# Altium PCB ControlBoard.PcbDoc
Units mil, origin at the board's own origin, x right, y up, seen from the top; angles counter-clockwise.
Board outline 1195.03 x 1520.03 mil, 4 copper layers (Top Layer, POWER, GND, Bottom Layer), stack 23.756 mil thick; 32 components, 19 nets, 79 pads, 31 vias.
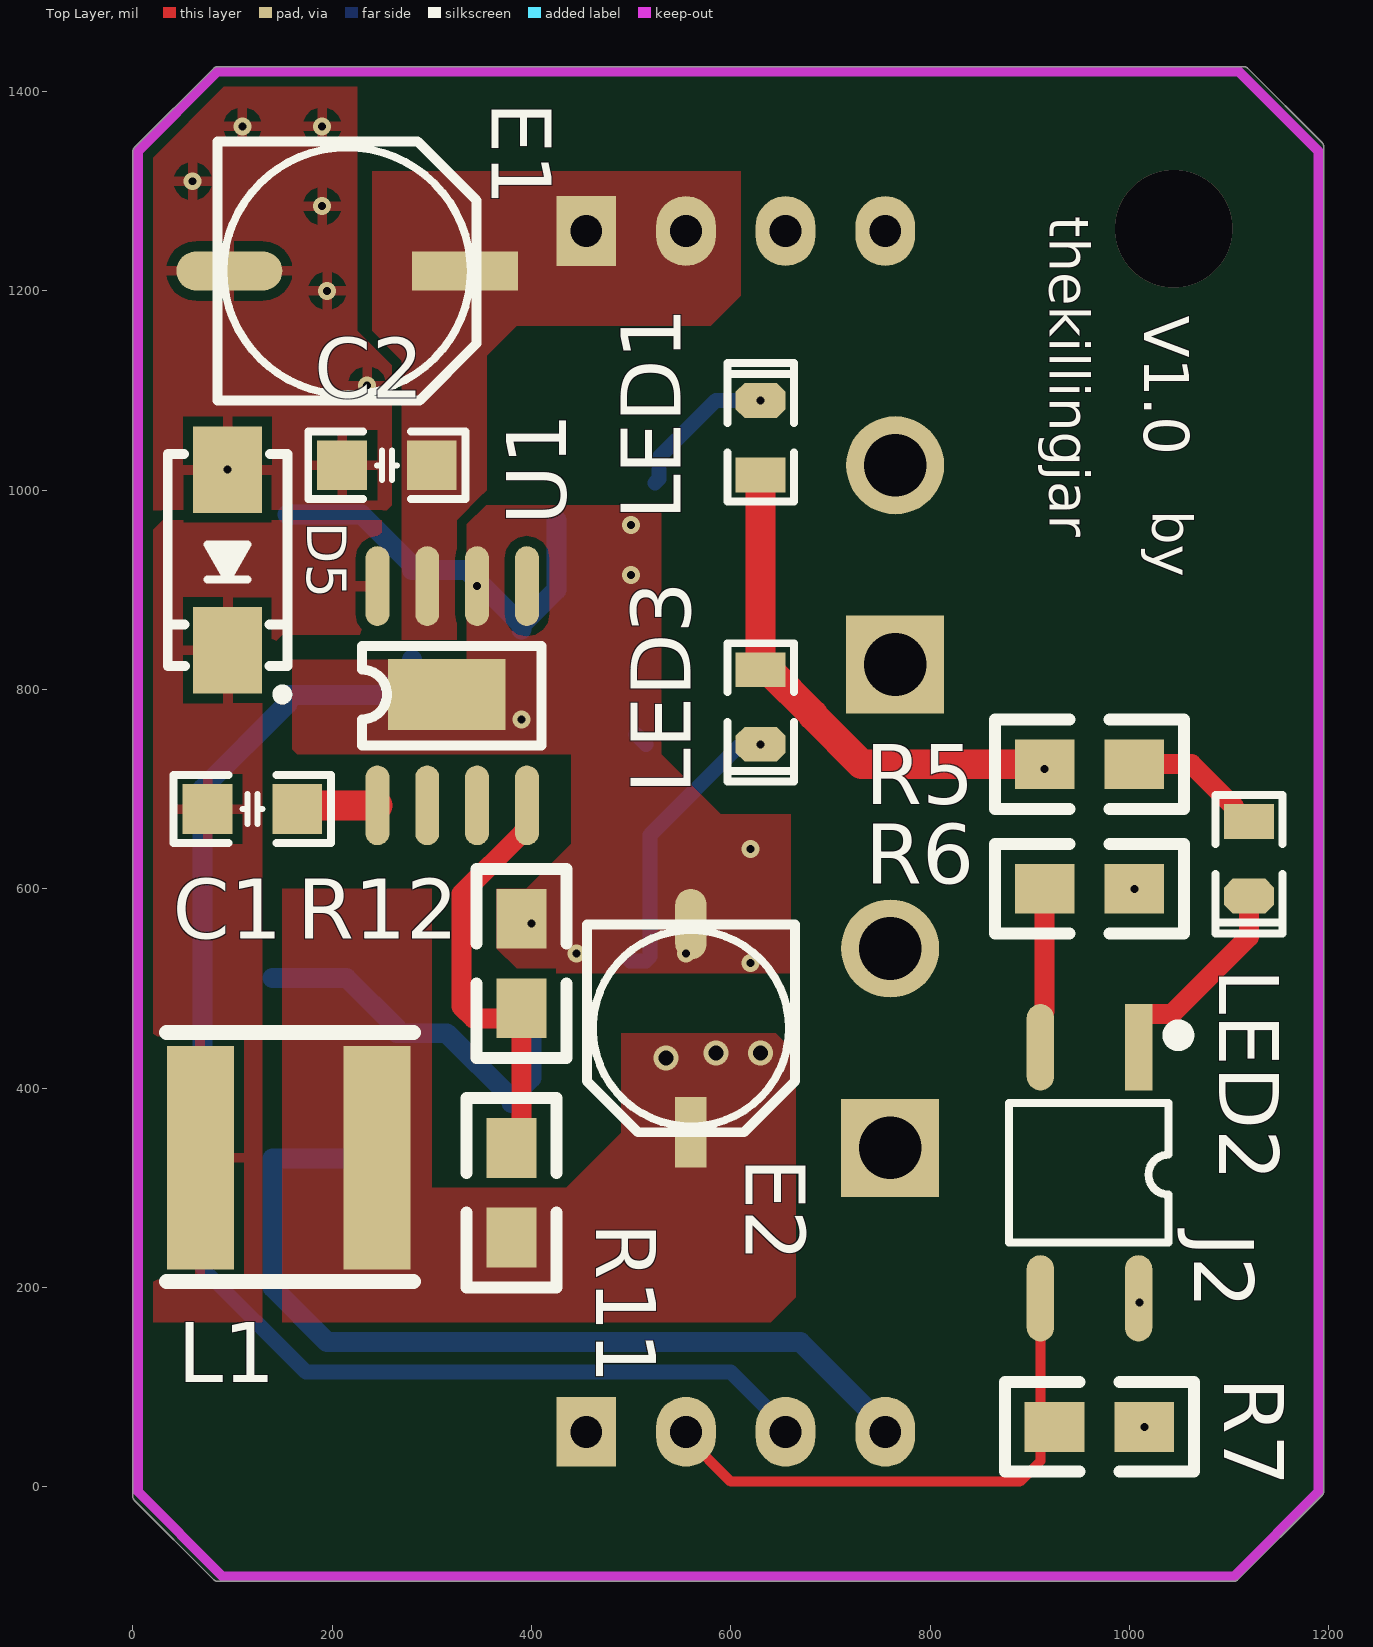
[diagram p0: Top Layer view]
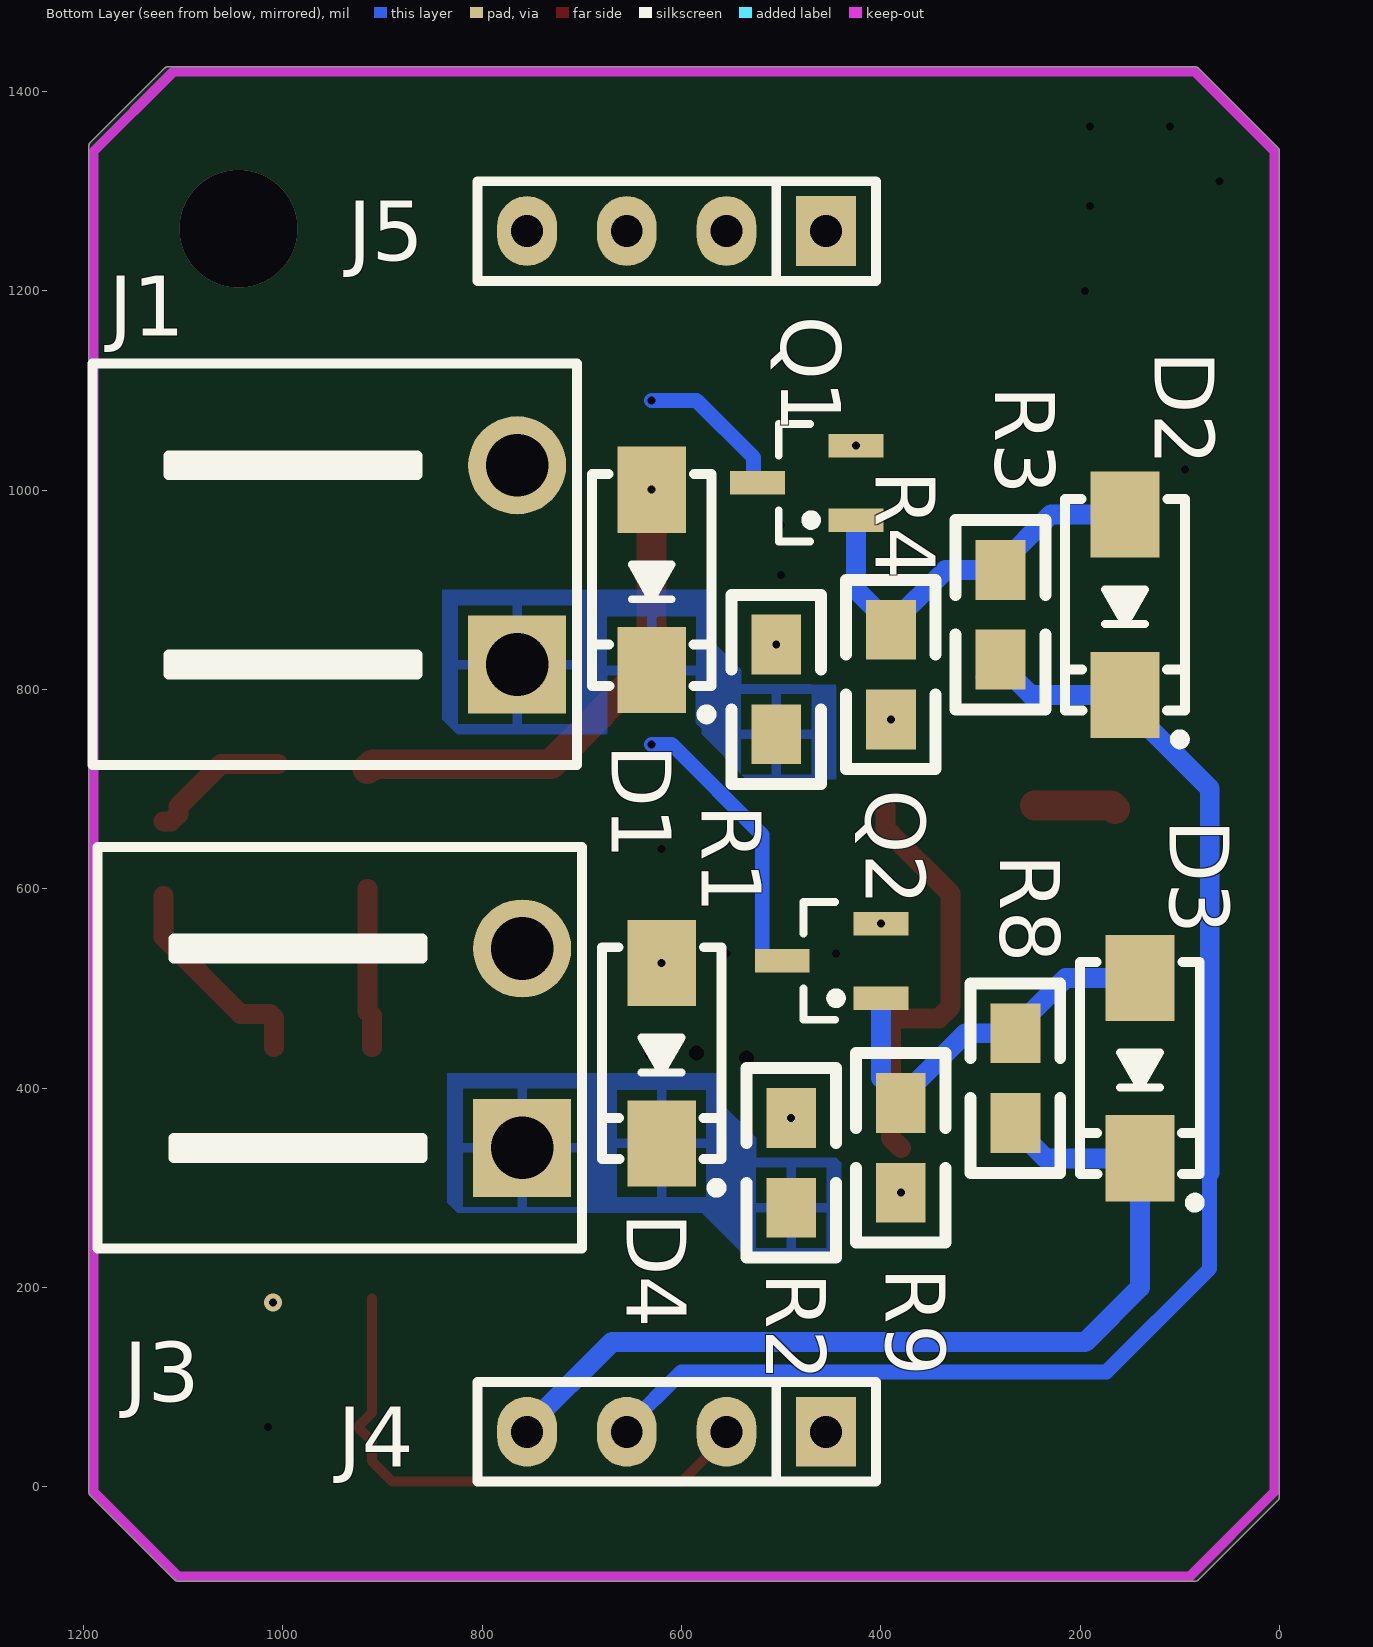
[diagram p1: Bottom Layer view, seen from below]
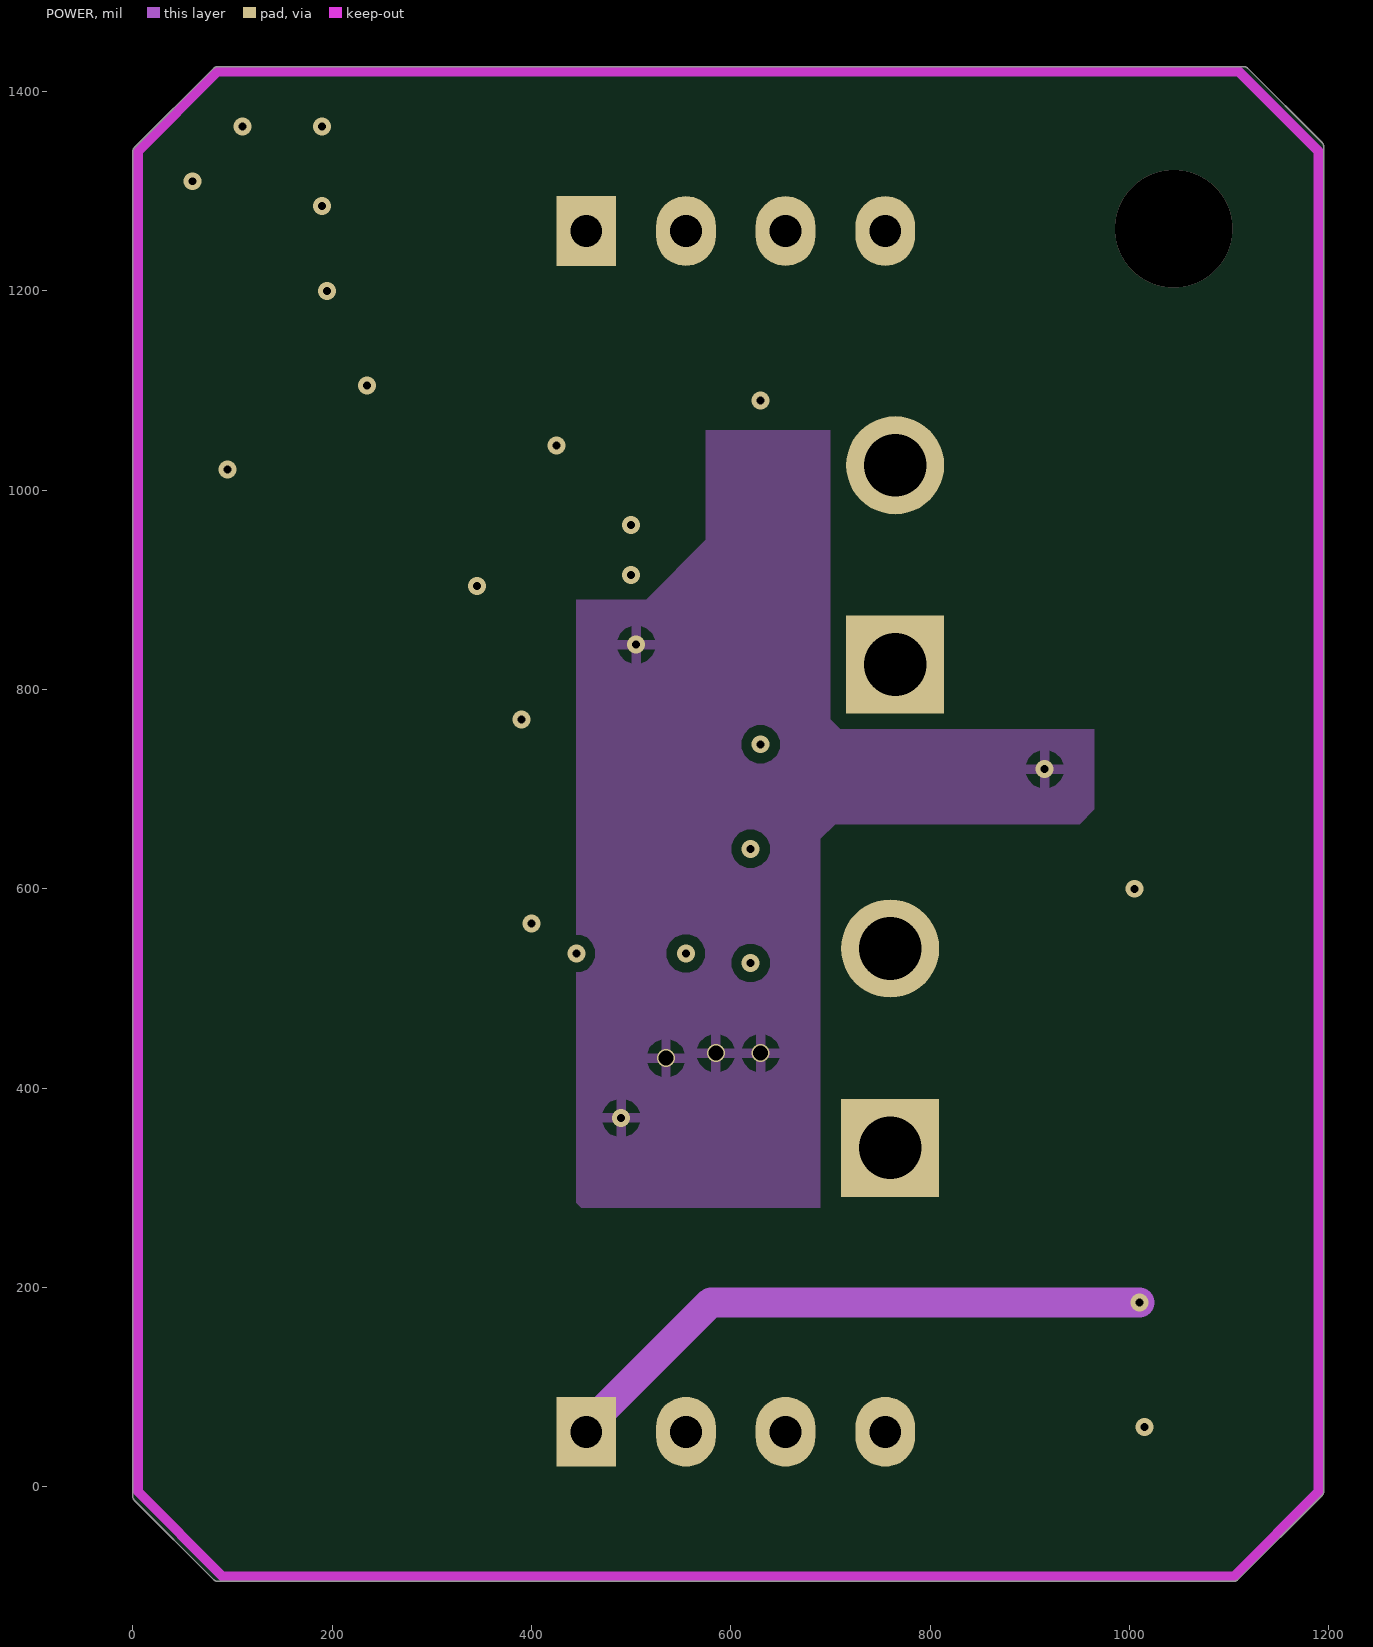
[diagram p2: POWER]
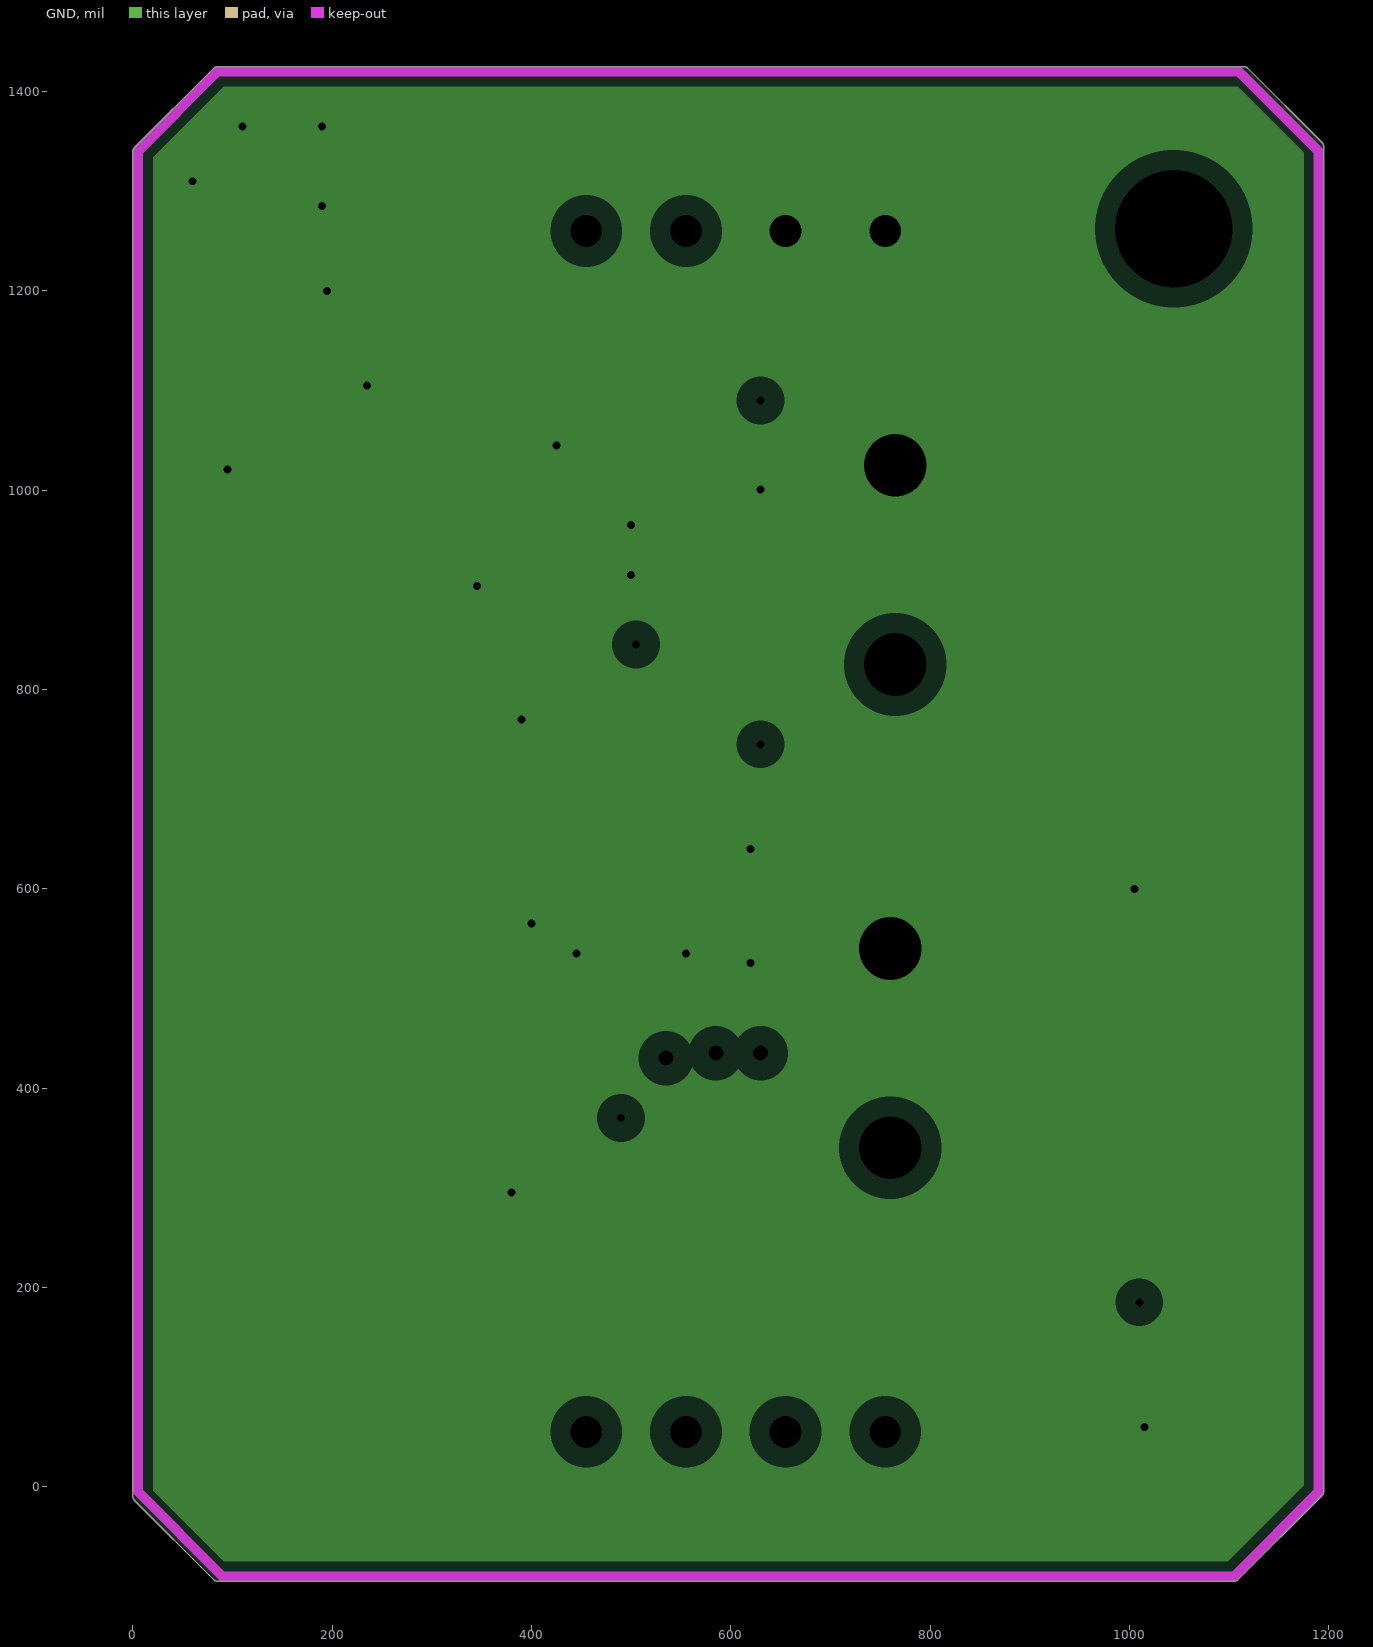
[diagram p3: GND, clearances drawn from the general rule]

## Layer stack, top to bottom
Top Solder: solder mask 0.4, Solder Resist, Dk 3.5
Top Layer: signal copper 1.4
Dielectric 2: prepreg 2.8, PP-006, Dk 4.1
POWER: signal copper 1.378
Dielectric 1: dielectric 12.6, FR-4, Dk 4.8
GND: plane copper 1.378, net GND
Dielectric 3: prepreg 2.8, PP-006, Dk 4.1
Bottom Layer: signal copper 1.4
Bottom Solder: solder mask 0.4, Solder Resist, Dk 3.5

## Board outline
1.47,-13.56 cw(c5,-10) -0.01,-10 -0.01,1340 cw(c5,1340) 1.47,1343.56 1.45,1343.55 81.45,1423.55 81.44,1423.53 cw(c85,1420) 85,1425.01 1115,1425.01 cw(c1115,1420) 1118.56,1423.53 1118.55,1423.55 1193.55,1348.55 1193.53,1348.56 cw(c1190,1345) 1195.01,1345 1195.01,-5 cw(c1190,-5) 1193.53,-8.56 1193.55,-8.55 1108.55,-93.55 1108.56,-93.53 cw(c1105,-90) 1105,-95.01 85,-95.01 cw(c85,-90) 81.44,-93.53 81.45,-93.55

## Design rules (kind name [scope] priority, off if disabled: settings)
Clearance [All] p1: gap=10 ignorepadtopadclearanceinfootprint=FALSE except(0: Arc-Hole Track-Hole SMDPad-Hole THPad-Hole Via-Hole Fill-Hole Poly-Hole Region-Hole Text-Hole)
HoleSize [All] p1: absolutevalues=TRUE maxlimit=120 minlimit=1 maxpercent=80.000 minpercent=20.000
PlaneClearance [All] p1: clearance=20
PlaneConnect [All] p1: planeconnectstyle=Relief reliefexpansion=20 reliefentries=4 reliefconductorwidth=10 reliefairgap=10
PolygonConnect GND_L01_P003 [All vs IsNamedPolygon('GND_L01_P003')] p1: connectstyle=Direct reliefconductorwidth=10 reliefentries=4 polygonreliefangle="90 Angle" airgapwidth=10
PolygonConnect VCC_24V_L01_P002 [All vs IsNamedPolygon('VCC_24V_L01_P002')] p2: connectstyle=Direct reliefconductorwidth=10 reliefentries=4 polygonreliefangle="90 Angle" airgapwidth=10
PolygonConnect 11 [All vs IsNamedPolygon('VCC_24V_L01_P002')] p3: connectstyle=Direct reliefconductorwidth=10 reliefentries=4 polygonreliefangle="90 Angle" airgapwidth=10
PolygonConnect PolygonConnect_4 [All vs IsNamedPolygon('VCC_24V_L01_P002')] p4: connectstyle=Direct reliefconductorwidth=10 reliefentries=4 polygonreliefangle="90 Angle" airgapwidth=10
PolygonConnect PolygonConnect_3 [All vs IsNamedPolygon('ACTUATOR_IN_L01_P000')] p5: connectstyle=Direct reliefconductorwidth=10 reliefentries=4 polygonreliefangle="90 Angle" airgapwidth=10
PolygonConnect 123 [All vs IsNamedPolygon('ACTUATOR_IN_L01_P000')] p6: connectstyle=Direct reliefconductorwidth=10 reliefentries=4 polygonreliefangle="90 Angle" airgapwidth=10
PolygonConnect PolygonConnect_2 [All vs IsNamedPolygon('ACTUATOR_IN_L01_P000')] p7: connectstyle=Direct reliefconductorwidth=10 reliefentries=4 polygonreliefangle="90 Angle" airgapwidth=10
PolygonConnect PolygonConnect_1 [All vs IsNamedPolygon('ACTUATOR_IN_L01_P000')] p8: connectstyle=Direct reliefconductorwidth=10 reliefentries=4 polygonreliefangle="90 Angle" airgapwidth=10
PolygonConnect [All] p9: connectstyle=Relief reliefconductorwidth=10 reliefentries=4 polygonreliefangle="90 Angle" airgapwidth=10
RoutingVias RoutingVias_1 [InNet('No Net')] p1: holewidth=28 width=50 viastyle="Through Hole" minholewidth=28 minwidth=50 maxholewidth=200 maxwidth=200
RoutingVias [All] p2: holewidth=8 width=18 viastyle="Through Hole" minholewidth=8 minwidth=18 maxholewidth=20 maxwidth=35
SilkToSilkClearance [All] p1 off: silktosilkclearance=10
SilkToSolderMaskClearance [IsPad] p1 off: minsilkscreentomaskgap=10 clearancetoexposedcopper=TRUE
SolderMaskExpansion [All] p1: expansion=4 istentingtop=FALSE
Width [All] p1: maxlimit=30 minlimit=10 preferedwidth=10 minimp=50.000000 maximp=50.000000 favimp=50.000000
25 further rules are at their usual default settings.

## Classes and differential pairs
polygon class PolygonClass_1: VCC_24V_L01_P002

## Components (designator, comment, footprint, x,y, rotation, side; value= is the part's Value field where it differs from the comment)
C1 "0.01uF" "C 0805_M" 119.99,679.99 r180 top
C2 "10nF" "C 0805_M" 255,1025 r180 top
D1 "SS14" SMA 630,910 r270 bottom
D2 "SS14" SMA 155,885 r270 bottom
D3 "SS14" SMA 140,420 r270 bottom
D4 "SS14" SMA 620,435 r270 bottom
D5 "B340A" SMA 95,930 r270 top
E1 "100uF/35V" "CM D(6.3*7.7)" 215,1220 r0 top
E2 "10uF/25V" "CM C(5*5.4)" 560,460 r270 top
J1 "KF2EDGK-2P" KF2EDGK5.08W-2P 765,825 r90 bottom
J2 "TLP181" SOP4 960,315 r270 top
J3 "KF2EDGK-2P" KF2EDGK5.08W-2P 760,340 r90 bottom
J4 "Pin HDR1X4" "PIN HDR1X4/2.54MM-S" 455,55 r270 bottom
J5 "Pin HDR1X4" "PIN HDR1X4/2.54MM-S" 455,1260 r270 bottom
L1 "68uH" SMD,6.0*6.0 156.42,330 r0 top
LED1 "蓝色" "LED 0805B" 629.99,1052.6 r90 top
LED2 "白色" "LED 0805W" 1120,630 r270 top
LED3 "蓝色" "LED 0805B" 630.01,782.4 r270 top
Q1 "AO3400" SOT23 425,970 r90 bottom
Q2 "AO3400" SOT23 400,490.2 r90 bottom
R1 "0R" 0805R 505,755 r90 bottom
R2 "0R" 0805R 490,280 r90 bottom
R3 "30R" 0805R 280,920 r270 bottom
R4 "10K" 0805R 390,860 r270 bottom
R5 "2K2" 0805R 1005,725 r180 top
R6 "100R" 0805R 915,600 r0 top
R7 "1K" 0805R 925,60 r0 top
R8 "30R" 0805R 265,455 r270 bottom
R9 "10K" 0805R 380,385 r270 bottom
R11 "10K" 0805R 380,340 r270 top
R12 "536R" 0805R 390,570 r270 top
U1 "TPS5430" SOP8-PAD 245,685 r90 top

## Footprints (in the part's own frame and the unit in brackets; to place one, negate y for a bottom-side part, rotate by r counter-clockwise, add the part's x,y. Pads: shape width x height; smd on the part's side, far side on the other; paste and mask are expansions set on the pad)
0805R [mil]
  rect 60x50 smd: 1(0,0) 2(90,0)
  silkscreen extent -50,-45 140,45, body extent 1,-25 80,25, height 15
"C 0805_M" [mil] "无极性贴片电容"
  rect 50x50 smd: 1(-45.01,-0.01) 2(45,0)
  silkscreen extent -79,-34 79,34, body extent -39,-24 39,24, height 20
"CM C(5*5.4)" [mm] "贴片电解电容，直径5mm，高5.4mm"
  rect 1.8x0.8 smd: 1(2.65,0)
  oval 1.8x0.8 smd: 2(-2.65,0)
  silkscreen extent -2.65,-2.65 2.65,2.65, body extent -2.95,-2.65 2.95,2.65, height 5.4
"CM D(6.3*7.7)" [mm] "贴片电解电容，直径6.3mm，高7.7mm"
  rect 2.7x1 smd: 1(3,0)
  oval 2.7x1 smd: 2(-3,0)
  silkscreen extent -3.3,-3.3 3.3,3.3, body extent -3.5,-3.3 3.5,3.3, height 7.7
KF2EDGK5.08W-2P [mm]
  rect 2.5x2.5 hole 1.6: 1(0,0)
  round 2.5 hole 1.6: 2(5.08,0)
  silkscreen extent -2.57,-1.52 7.67,10.82, body extent -2.54,-0.57 7.62,10.73, height 8.5
"LED 0805B" [mil] "蓝色0805LED"
  rect 35x50 smd: 1(-37.4,-0.01)
  oct 35x50 smd: 2(37.4,-0.01)
  silkscreen extent -64,-33 75,33, body extent -39,-25 39,25, height 32
"LED 0805W" [mil] "白色0805LED"
  rect 35x50 smd: 1(-37.4,0)
  oct 35x50 smd: 2(37.4,0)
  silkscreen extent -64,-33 75,33, body extent -39,-25 39,25, height 32
"PIN HDR1X4/2.54MM-S" [mil]
  rect 70x60 hole 32: 1(0,0)
  oval 70x60 hole 32: 2(0,-100) 3(0,-200) 4(0,-300)
  silkscreen extent -50,-350 50,50, body extent -50,-350 50,50, height 336
SMA [mm] "4.5x2.6*2.2mm（长宽高，不包括引脚）"
  rect 2.2x1.75 smd: 1(-2.3,0) 2(2.3,0)
  silkscreen extent -2.7,-1.52 3.56,1.52, body extent -2.52,-1.3 2.57,1.3, height 2.15
SMD,6.0*6.0 [mm]
  rect 1.7x5.7 smd: 1(-2.25,0) 2(2.25,0)
  silkscreen extent -3.12,-3.15 3.18,3.2
SOP4 [mm] "4.4*6.8*2.1mm（长宽高）"
  rect 2.2x0.7 smd: 1(-3.2,1.25)
  oval 2.2x0.7 smd: 2(-3.2,-1.25) 3(3.2,-1.25) 4(3.2,1.25)
  silkscreen extent -3.66,-2.05 1.78,2.42, body extent -3.4,-2.15 3.4,2.15, height 1.9
SOP8-PAD [mil]
  oval 80x24 smd: 1(-1.24,-0.45) 2(-1.24,-50.45) 3(-1.24,-100.45) 4(-1.24,-150.45) 5(218.76,-150.45) 6(218.76,-100.45) 7(218.76,-50.45) 8(218.76,-0.45)
  rect 70.87x118.11 smd: 9(110,-70)
  silkscreen extent 59,-165 159,15, body extent -8,-177 228,20, height 75
SOT23 [mm]
  rect 0.6x1.4 smd: D(0.95,2.514) G(0,0) S(1.9,0)
  silkscreen extent -0.55,1.02 2.45,1.97, body extent -0.56,0.22 2.44,2.62, height 1.05

## Part data
C1 C2: library part C, "无极性贴片电容"
D1 D2 D3 D4: "肖特基二极管", BOM名称=肖特基二极管, 学习资源=www.ooocke.com, 属性=40V/1A, 版权归属=源创客
D5: library part SS34, "肖特基二极管 / 反向耐压大于28.5V", BOM名称=肖特基二极管, 学习资源=www.ooocke.com, 属性=40V/3A, 版权归属=源创客
E1: library part C-CM, "贴片电解电容 / ESR < 0.04R", BOM名称=贴片电解电容, 学习资源=www.ooocke.com, 版权归属=源创客
E2: library part C-CM, "贴片电解电容 / ESR < 0.088R / V>24.0002V", BOM名称=贴片电解电容, 学习资源=www.ooocke.com, 版权归属=源创客
J2: "光耦", BOM名称=光耦, 学习资源=www.ooocke.com, 版权归属=源创客
L1: library part L-CD, "贴片功率电感 / Irms>0.500003A / Ipk>0.563A", BOM名称=功率电感, 学习资源=www.ooocke.com, 版权归属=源创客
LED1 LED2 LED3: library part LED-SMD, "贴片LED", BOM名称=贴片LED, 学习资源=www.ooocke.com, 版权归属=源创客
Q1 Q2: library part N-MOS, "N沟道场效应管"
R1 R2 R3 R4 R5 R6 R7 R8 R9 R11 R12: library part RES, "贴片电阻"
U1: "DCDC降压芯片"

## Via types
v1: diameter 18/18/0 (per signal layer), hole 8, Top Layer to Bottom Layer, 17 vias
v2: diameter 18/18 (per signal layer), hole 8, Top Layer to GND, 3 vias
v3: diameter 18/0 (per signal layer), hole 8, POWER to Bottom Layer, 3 vias
v4: diameter 25/18/0 (per signal layer), hole 15, Top Layer to Bottom Layer, 3 vias
v5: diameter 0 (per signal layer), hole 8, GND to Bottom Layer, 2 vias
v6: diameter 118.11, hole 118.11, Top Layer to Bottom Layer, 1 vias
v7: diameter 18/18 (per signal layer), hole 8, Top Layer to POWER, 1 vias
v8: diameter 18/18/18 (per signal layer), hole 8, Top Layer to Bottom Layer, 1 vias

## Nets (pads, with @x,y where several pads share a name; then routed paths per layer and width w, separated by ;. In a path a pad name is that pad's centre, name@x,y a point inside that pad or via, vN(x,y) a via of type N, cw(c..) or ccw(c..) an arc to the next point about the centre after c; other vN are vias at no path point)
actuator_IN: C2.1 E1.1 J5.1 J5.2 U1.7
brake_control1_5V: D2.2 J4.3 R3.2 | length 1434
  Bottom Layer w15: 70,315 70,218.79 173.79,115 600,115 655,60 J4.3 ; R3.2 R3.2@297.5,812.5
  Bottom Layer w20: 70,315 70,700.59 155,785.59 D2.2 249.45,794.45 280,825 R3.2
brake_control2_5V: D3.2 J4.4 R8.2 | length 950.1
  Bottom Layer w20: R8.2 265,360 234.45,329.45 D3.2 140,200 195,145 670,145 755,60 J4.4
GND: C2.2 D1.1 D4.1 D5.1 E1.2 E2.2 J1.2 J3.2 J5.3 J5.4 Q1.S Q2.S R4.2 R6.2 R7.2 R9.2 R12.1 U1.6 U1.9
  other v1: 1015,60 620,525.55 445,535 555,535 400,565 620,640 390,770 500,915 500,965 95,1020.55 195,1200 190,1285 60,1310 110,1365 190,1365
  other v2: 1005,600 345.45,903.76 235,1105
  other v3: 425,1044.8
  other v5: 380,295 630,1000.55
NetC1_1: C1.1 U1.1 | length 82
  Top Layer w30: C1.1 168.76,683.76 U1.1
NetC1_2: C1.2 D5.2 L1.1 U1.8
NetD1_2: D1.2 J1.1 R1.1 | length 23
  Bottom Layer w15: R1.1 R1.1@515,745 ; D1.2@630,810.59 D1.2
NetD2_1: D2.1 Q1.G R3.1 R4.1 | length 408.2
  Bottom Layer w20: D2.1 229.45,975.55 280,925 R3.1 335,920 R4.1@390,865 ; R4.1 R4.1@390,865 ; Q1.G 425,900 R4.1@390,865
NetD3_1: D3.1 Q2.G R8.1 R9.1 | length 422.1
  Bottom Layer w20: D3.1 214.45,510.55 265,460 R8.1 315,455 R9.1@380,390 ; R9.1 R9.1@380,390 ; Q2.G@384.25,490.2 Q2.G 400,410 R9.1@380,390
NetD4_2: D4.2 J3.1 R2.1
NetJ2_1: J2.1 LED2.2 | length 214.8
  Top Layer w20: J2.1 1009.21,470.51 1012.99,474.29 1042.52,474.29 1120,551.77 LED2.2
NetJ2_2: J2.2 R6.1 | length 160.8
  Top Layer w20: J2.2 910.79,472.56 915,476.77 R6.1
NetLED1_2: LED1.2 Q1.D | length 152.9
  Bottom Layer w15: Q1.D 527.93,1011.36 527.93,1032.93 585,1090 v1(630,1090)
NetLED2_1: LED2.1 R5.1 | length 143.3
  Top Layer w20: R5.1 1062.4,725 1105,682.4 1105,674.9 1112.5,667.4 LED2.1
NetLED3_2: LED3.2 Q2.D | length 292.6
  Bottom Layer w15: Q2.D 514.72,527.6 519.03,531.91 519.03,654.03 610,745 v1(630,745)
NetR11_1: R11.1 R12.2 U1.4 | length 434.4
  Top Layer w20: R11.1 390,350 390,468.11 R12.2@390,470 ; R12.2 380,470 341.72,470 330,481.72 330,595 389.99,654.99 393.6,654.99 395.45,656.84 U1.4
shutdown_circuit_5V: J2.3 J4.2 R7.1 | length 563
  Top Layer w10: J4.2 555,50 600,5 890,5 910.86,25.86 910.86,45.86 R7.1 910.79,74.21 J2.3
VCC_5V: J2.4 J4.1 | length 611.8
  POWER w30: J4.1 455,60 580,185 v8(1010,185)
VCC_24V: E2.1 L1.2 LED1.1 LED3.1 R1.2 R2.2 R5.2 R11.2 | length 522.4
  Top Layer w30: LED1.1 LED3.1 637.5,819.8 682.43,774.88 682.43,773.79 731.22,725 910,725 v7(915,720)
  other v3: 490,370 505,845
  other v4: 535,430 585,435 630,435
pads on no net: U1.2 U1.3 U1.5
copper on no net:
  other v6: 1044.56,1262.45

## Polygon pours and split planes (outlines as drawn)
GND on Top Layer "GND_L01_P004" (solid, pour order 4): 90,1415 10,1335 15,1330 15,980 255,980 260,985 260,1125 225,1160 225,1415
actuator_IN on Top Layer "ACTUATOR_IN_L01_P000" (solid, pour order 0): 240,1320 610,1320 610,1195 580,1165 385,1165 355,1135 355,1000 325,970 325,850 270,850 270,1130 240,1160
GND on Top Layer "GND_L01_P003" (solid, pour order 3): 160,830 160,740 165,735 440,735 440,645 395,600 365,600 365,540 390,515 660,515 660,675 590,675 530,735 530,985 350,985 335,970 335,830
NetC1_2 on Top Layer "NETC1_2_L01_P001" (solid, pour order 1): 265,970 270,965 270,855 150,855 130,835 130,165 15,165 15,955 30,970
VCC_24V on Top Layer "VCC_24V_L01_P002" (solid, pour order 2): 150,600 150,165 640,165 665,190 665,435 645,455 490,455 490,355 435,300 300,300 300,600
NetD1_2 on Bottom Layer "NETD1_2_L04_P009" (solid, pour order 9): 570,900 840,900 840,770 825,755 580,755 535,710 445,710 445,810 530,810 570,850
NetD4_2 on Bottom Layer "NETD4_2_L04_P007" (solid, pour order 7): 565,415 835,415 835,285 825,275 580,275 530,225 440,225 440,325 445,330 504.97,330 565,390.03
VCC_24V on POWER "VCC_24V_L02_P006" (solid, pour order 6): 575,1060 700,1060 700,770 710,760 965,760 965,680 950,665 705,665 690,650 690,280 450,280 445,285 445,890 515,890 575,950 575,1055
GND on GND (split plane): 1174.92,1338.75 1174.92,1.25 1098.75,-74.92 91.25,-74.92 20.08,-3.75 20.08,1333.75 91.25,1404.92 1108.75,1404.92

## Keep-outs
Keep-Out Layer:
  lines w10: 85,1420 5,1340 5,-5 90,-90 1105,-90 1190,-5 1190,1340 1110.04,1419.96 85.04,1419.96

## Other copper
Bottom Layer:
  pour cut-out: 445,810 470,810 470,805 469.71,804.71 445.09,804.71
  pour cut-out: 585.55,766.14 580,760.59 580,755 590,745 597.38,752.38 597.38,764.38 599.15,766.14
  pour cut-out: 674.45,766.14 674.45,754.45 670,750 665,755 665,770

## Silkscreen, mask and mechanical layers (free items; w line width, h text height)
Top Overlay:
  text "thekillingjar" at 920,1275 h40 r270
  text "V1.0" at 1015,1175 h45 r270
  text "by" at 1023.33,980 h40 r270
Mechanical 1:
  lines w10: 5,-10 85,-90 1105,-90 1190,-5 1190,1345 1115,1420 85,1420 5,1340 5,-10